# EAGLE board project (EAGLE 9.7.0)

Size 174.59 x 264.28 mm. Coordinates in mm from the lower left corner, seen from the top.
Outline: 0,0 174.59,0 174.59,264.28 0,264.28 0,0
Copper layers (1*16): Top 0.035mm / dielectric 1.5mm / Bottom 0.035mm
Design rules "default": minimum track width 6mil, minimum drill 0.35mm, track to track 6mil, track to pad 6mil, pad to pad 6mil, via to via 6mil, smd to smd 6mil, copper to edge 40mil, drill to drill 6mil, minimum pad ring 10mil, minimum via ring 8mil, stop-mask expansion 4mil, vias tented up to drill 0mil, thermal gap 10mil

## Footprints (pad centres in the part's own frame; a part is rotated, then mirrored left to right if it is on the bottom)
LU-5-R = drill 0.8: 1 -6.35,-3.81; 5 3.81,-3.81; 6 6.35,-3.81; 7 6.35,3.81; 8 3.81,3.81; 12 -6.35,3.81
BATTERY-GENERIC = drill 1.118 pad 3.15 octagon: + 2.54,0; - -2.54,0
RESAD1016W63L850D250B = drill 0.83 pad 1.43: 1 -5.08,0; 2 5.08,0
SWITCH-MOMENTARY-PTH-6.5MM = drill 1.016 pad 1.88: 1 -3.251,2.261; 2 3.251,2.261; 3 -3.251,-2.261; 4 3.251,-2.261
ARDUINO-UNO-R3-SHIELD = drill 1.016 pad 1.88: 3.3V 24.13,-2.54; 5V 24.13,0; A0 24.13,12.7; A1 24.13,15.24; A2 24.13,17.78; A3 24.13,20.32; A4 24.13,22.86; A5 24.13,25.4; AREF -24.13,-13.97; D2 -24.13,20.32; D3 -24.13,17.78; D4 -24.13,15.24; D5 -24.13,12.7; D6 -24.13,10.16; D7 -24.13,7.62; D8 -24.13,3.81; D9 -24.13,1.27; D10 -24.13,-1.27; D11 -24.13,-3.81; D12 -24.13,-6.35; D13 -24.13,-8.89; GND@0 24.13,2.54; GND@1 24.13,5.08; GND@2 -24.13,-11.43; IOREF 24.13,-7.62; NC 24.13,-10.16; RES 24.13,-5.08; RX -24.13,25.4; SCL -24.13,-19.05; SDA -24.13,-16.51; TX -24.13,22.86; VIN 24.13,7.62
LCD-I2C = drill 1.016 long: 1 -19.05,-5.08; 2 -19.05,-7.62; 3 -19.05,-10.16; 4 -19.05,-12.7
DIP826W53P254L959H508Q8B = drill 0.786 pad 1.386: 1 -4.13,3.81; 2 -4.13,1.27; 3 -4.13,-1.27; 4 -4.13,-3.81; 5 4.13,-3.81; 6 4.13,-1.27; 7 4.13,1.27; 8 4.13,3.81

## Placement (x,y rotation side)
K1  RELAY-SPDT_LU-5-R  [LU-5-R]  79.53,132.85 180 top
K2  RELAY-SPDT_LU-5-R  [LU-5-R]  104.93,132.85 180 top
K3  RELAY-SPDT_LU-5-R  [LU-5-R]  163.67,145.48 180 top
K4  RELAY-SPDT_LU-5-R  [LU-5-R]  130.33,132.85 180 top
P1  BATTERYGENERIC  [BATTERY-GENERIC]  71.69,34.87 180 top
R1  1k  [RESAD1016W63L850D250B]  88.22,8.87 0 top
R2  1k  [RESAD1016W63L850D250B]  98.38,6.33 0 top
R3  1k  [RESAD1016W63L850D250B]  118.7,6.33 0 top
R4  1k  [RESAD1016W63L850D250B]  108.54,8.87 0 top
R5  1k  [RESAD1016W63L850D250B]  7.58,121.74 90 top
R6  1G  [RESAD1016W63L850D250B]  90.96,121.42 0 top
R7  1k  [RESAD1016W63L850D250B]  113.82,121.42 180 top
R8  1000k  [RESAD1016W63L850D250B]  132.52,186.56 0 top
R9  1k  [RESAD1016W63L850D250B]  142.68,189.1 0 top
R10  0.1k  [RESAD1016W63L850D250B]  107.12,181.48 90 top
R11  1G  [RESAD1016W63L850D250B]  109.66,181.48 90 top
R12  1  [RESAD1016W63L850D250B]  141.76,121.42 0 top
R13  1k  [RESAD1016W63L850D250B]  109.33,43.6 0 top
S1  SWITCH_MOMENTARY  [SWITCH-MOMENTARY-PTH-6.5MM]  9.33,57.27 90 top
U1  ARDUINO-UNO-R3-SHIELD  [ARDUINO-UNO-R3-SHIELD]  72.28,234.44 270 top
U2  LCD-16X2-I2CSUNFOUNDER-IIC  [LCD-I2C]  30.73,97.97 0 top
U3  OPAMP_DIP  [DIP826W53P254L959H508Q8B]  126.17,180.21 90 top

## Library data of the parts
K1-K4 P1 R1-R13 S1 U1-U3 = Tinkercad

## Nets
P1+: P1.+ R1.1
P1-: P1.- R3.2
R2_1: R1.2 R2.1
R2_2: R2.2 R4.1
R4_2: R3.1 R4.2
R6_1: K1.1 K1.12 R6.1
R12_1: K4.1 K4.12 R9.2 R12.1
U1_5V: K2.6 R10.2 S1.3 U1.5V U2.2 U3.7
U1_A0: R8.1 U1.A0 U3.6
U1_A1: K3.6 R10.1 R11.1 R12.2 U1.A1 U3.3
U1_A2: K3.1 K3.12 R6.2 R7.2 R13.2 U1.A2
U1_A3: K1.6 K2.1 K2.12 K4.6 R13.1 U1.A3
U1_D2: R5.1 S1.1 S1.2 U1.D2
U1_D4: K3.5 U1.D4
U1_D8: K4.5 U1.D8
U1_D12: K2.5 U1.D12
U1_D13: K1.5 U1.D13
U1_GND: K1.8 K2.8 K3.8 K4.8 R5.2 R7.1 R11.2 U1.GND@0 U1.GND@1 U1.GND@2 U2.1 U3.4
U1_SCL: U1.SCL U2.4
U1_SDA: U1.SDA U2.3
U3_-IN: R8.2 R9.1 U3.2

## Tracks (layer width: path | path; a pad name or v marks a point on that pad's centre or on a via)
P1+  (1 unrouted)
P1-  (1 unrouted)
R2_1  (1 unrouted)
R2_2  (1 unrouted)
R4_2  (1 unrouted)
R6_1  (2 unrouted)
R12_1  (3 unrouted)
U1_5V  (5 unrouted)
U1_A0  (2 unrouted)
U1_A1  (5 unrouted)
U1_A2  (5 unrouted)
U1_A3  (5 unrouted)
U1_D2  (3 unrouted)
U1_D4  (1 unrouted)
U1_D8  (1 unrouted)
U1_D12  (1 unrouted)
U1_D13  (1 unrouted)
U1_GND  (11 unrouted)
U1_SCL  (1 unrouted)
U1_SDA  (1 unrouted)
U3_-IN  (2 unrouted)